# EAGLE board SPY SCH2 (EAGLE 8.7.0)
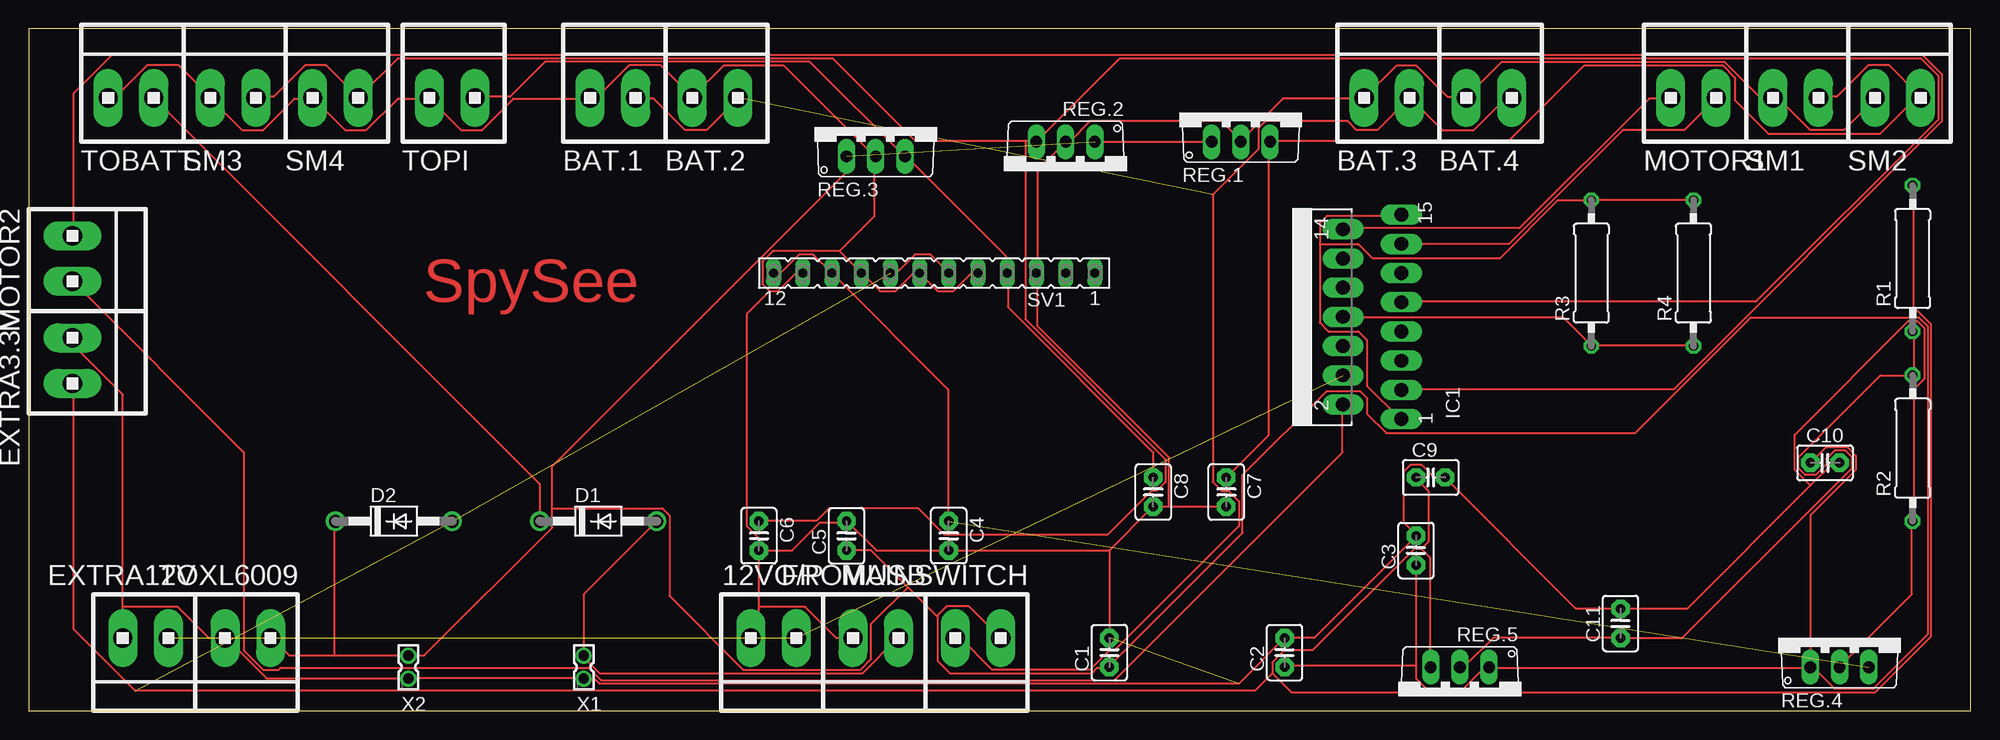
[diagram p0: board, top side]

Size 168.89 x 59.36 mm. Coordinates in mm from the lower left corner, seen from the top.
Outline: 0,0 168.89,0 168.89,59.36 0,59.36 0,0
Copper layers (1*16): Top 0.035mm / dielectric 1.5mm / Bottom 0.035mm
Design rules "default *": minimum track width 10mil, minimum drill 0.35mm, track to track 6mil, track to pad 6mil, pad to pad 6mil, via to via 6mil, smd to smd 6mil, copper to edge 40mil, drill to drill 6mil, minimum pad ring 10mil, minimum via ring 8mil, stop-mask expansion 4mil, vias tented up to drill 0mil, thermal gap 10mil

## Footprints (pad centres in the part's own frame; a part is rotated, then mirrored left to right if it is on the bottom)
1X2MTA = drill 1.676 long: 1 1.981,0; 2 -1.981,0
C2.5-3 = drill 0.813 pad 1.6 octagon: 1 -1.27,0; 2 1.27,0
DO41-10 = drill 1.118: A 5.08,0; C -5.08,0
MULTIWATT-15 = drill 1.2 long: 1 -8.89,-7.62; 2 -7.62,-2.54; 3 -6.35,-7.62; 4 -5.08,-2.54; 5 -3.81,-7.62; 6 -2.54,-2.54; 7 -1.27,-7.62; 8 0,-2.54; 9 1.27,-7.62; 10 2.54,-2.54; 11 3.81,-7.62; 12 5.08,-2.54; 13 6.35,-7.62; 14 7.62,-2.54; 15 8.89,-7.62
0309/12 = drill 0.813 octagon: 1 -6.35,0; 2 6.35,0
TO220V = drill 1.016 long: 1 -2.54,-2.54; 2 0,-2.54; 3 2.54,-2.54
FE12 = drill 0.813 long: 1 -13.97,0; 2 -11.43,0; 3 -8.89,0; 4 -6.35,0; 5 -3.81,0; 6 -1.27,0; 7 1.27,0; 8 3.81,0; 9 6.35,0; 10 8.89,0; 11 11.43,0; 12 13.97,0
332-02 = drill 0.9 pad 1.27: 1 0,-1; 2 0,1

## Placement (x,y rotation side)
12VO/P  [1X2MTA]  64.77,6.35 180 top
BAT.1  [1X2MTA]  50.8,53.34 0 top
BAT.2  [1X2MTA]  59.69,53.34 0 top
BAT.3  [1X2MTA]  118.11,53.34 0 top
BAT.4  [1X2MTA]  127,53.34 0 top
C1  [C2.5-3]  93.98,5.08 90 top
C2  [C2.5-3]  109.22,5.08 90 top
C3  [C2.5-3]  120.65,13.97 90 top
C4  [C2.5-3]  80.01,15.24 270 top
C5  [C2.5-3]  71.12,15.24 90 top
C6  [C2.5-3]  63.5,15.24 270 top
C7  [C2.5-3]  104.14,19.05 270 top
C8  [C2.5-3]  97.79,19.05 270 top
C9  [C2.5-3]  121.92,20.32 0 top
C10  [C2.5-3]  156.21,21.59 0 top
C11  [C2.5-3]  138.43,7.62 90 top
D1  1N4004  [DO41-10]  49.53,16.51 0 top
D2  1N4004  [DO41-10]  31.75,16.51 0 top
EXTRA3.3V  [1X2MTA]  3.81,30.48 270 top
EXTRA12V  [1X2MTA]  10.16,6.35 180 top
FROMUSB  [1X2MTA]  73.66,6.35 180 top
IC1  L298  [MULTIWATT-15]  111.76,34.29 90 top
MAINSWITCH  [1X2MTA]  82.55,6.35 180 top
MOTOR1  [1X2MTA]  144.78,53.34 0 top
MOTOR2  [1X2MTA]  3.81,39.37 270 top
R1  [0309/12]  163.83,39.37 90 top
R2  [0309/12]  163.83,22.86 90 top
R3  [0309/12]  135.89,38.1 90 top
R4  [0309/12]  144.78,38.1 90 top
REG.1  7805TV  [TO220V]  105.41,52.07 0 top
REG.2  7805TV  [TO220V]  90.17,46.99 180 top
REG.3  7805TV  [TO220V]  73.66,50.8 0 top
REG.4  7805TV  [TO220V]  157.48,6.35 0 top
REG.5  AMS117  [TO220V]  124.46,1.27 180 top
SM1  [1X2MTA]  153.67,53.34 0 top
SM2  [1X2MTA]  162.56,53.34 0 top
SM3  [1X2MTA]  17.78,53.34 0 top
SM4  [1X2MTA]  26.67,53.34 0 top
SV1  [FE12]  78.74,38.1 180 top
TOBATT.  [1X2MTA]  8.89,53.34 0 top
TOPI  [1X2MTA]  36.83,53.34 0 top
TOXL6009  [1X2MTA]  19.05,6.35 180 top
X1  CHARGING  [332-02]  48.26,3.81 0 top
X2  ON STATE  [332-02]  33.02,3.81 0 top

## Library data of the parts
12VO/P BAT.1-BAT.4 EXTRA3.3V EXTRA12V FROMUSB MAINSWITCH MOTOR1 MOTOR2 SM1-SM4 TOBATT. TOPI TOXL6009 = con-amp
C1-C11 = capacitor-wima
D1 D2 = diode
IC1 = st-microelectronics; MPN: L298N; OC_FARNELL: 1589425; OC_NEWARK: 32M1527
R1-R4 = resistor
REG.1-REG.5 = linear
SV1 = con-lsta; OC_FARNELL: unknown; OC_NEWARK: unknown
X1 X2 = con-garry

## Nets
N$1: 12VO/P.2 EXTRA12V.2 IC1.4
N$2: 12VO/P.1 BAT.1.2 BAT.2.2 BAT.3.2 BAT.4.2 C1.2 C2.2 C3.2 C4.2 C5.2 C6.2 C7.2 C8.2 C9.2 C10.2 C11.2 EXTRA3.3V.2 EXTRA12V.1 FROMUSB.1 R2.1 REG.1.2 REG.2.2 REG.3.2 REG.4.2 SM1.2 SM2.2 SM3.2 SM4.2 SV1.3 SV1.5 SV1.7 SV1.9 SV1.11 TOBATT..2 TOPI.2 TOXL6009.1 X1.1 X2.1
N$3: D1.C TOBATT..1
N$4: D1.A FROMUSB.2 X1.2
N$8: C8.1 REG.3.3 SV1.4 TOPI.1
N$9: C6.1 IC1.9 REG.2.3 SM3.1 SM4.1
N$15: C1.1 C2.1 C3.1 C5.1 C10.1 D2.C MAINSWITCH.2 REG.1.1 REG.2.1 REG.3.1 REG.4.1 REG.5.1 TOXL6009.2 X2.2
N$16: BAT.1.1 BAT.2.1 BAT.3.1 BAT.4.1 MAINSWITCH.1
N$17: C9.1 D2.A EXTRA3.3V.1 R1.2 REG.5.3 SV1.6 SV1.8
N$19: C4.1 REG.4.3 SV1.10 SV1.12
N$20: C7.1 REG.1.3 SM1.1 SM2.1
N$53: C11.1 R1.1 R2.2 REG.5.2
N$55: IC1.1 IC1.15 R3.2 R4.2
N$57: IC1.2 MOTOR2.1
N$58: IC1.3 MOTOR2.2
N$59: IC1.13 MOTOR1.1
N$60: IC1.14 MOTOR1.2
N$63: IC1.8 R3.1 R4.1

## Tracks (layer width: path | path; a pad name or v marks a point on that pad's centre or on a via)
N$1  (2 unrouted)
N$2  (1 unrouted)
  Top 0.152: SM2.2 160.58,53.29 157.84,50.55 154.94,50.55 152.2,53.29 151.74,53.29 SM1.2 151.59,53.44 150.52,53.44 147.47,56.49 128.12,56.49 125.07,53.44 BAT.4.2 124.92,53.44 123.39,53.44 120.65,56.18 118.97,56.18 BAT.3.2 116.08,53.29 109.07,53.29 105.41,49.63 | 105.41,49.63 103.73,51.31 92.3,51.31 90.63,49.63 90.17,49.63 REG.2.2 90.17,49.48 87.73,47.04 87.73,38.2 SV1.3 87.73,38.05 87.73,33.48 99.16,22.05 99.16,17.78 | 105.41,49.63 REG.1.2 | 93.98,13.97 C1.2 | 93.98,13.97 C8.2 99.16,17.78 | 99.16,17.78 C7.2 | 63.5,9.09 63.5,6.96 62.89,6.35 12VO/P.1 | 63.5,9.09 C6.2 | C6.2 66.4,13.97 68.83,16.41 71.12,16.41 C5.2 71.12,16.56 73.71,13.97 C4.2 93.98,13.97 | FROMUSB.1 70.21,6.35 67.46,9.09 63.5,9.09 | 64.41,36.52 65.18,36.52 66.7,38.05 67.31,38.05 SV1.11 | 64.41,36.52 63.81,37.13 63.81,39.12 64.72,40.03 70.51,40.03 | 70.51,40.03 72.34,38.2 SV1.9 72.49,38.05 74.02,36.52 75.39,36.52 76.91,38.05 77.37,38.05 SV1.7 79.05,36.52 80.42,36.52 81.94,38.05 82.55,38.05 SV1.5 | 73.56,48.26 73.56,43.08 70.51,40.03 | 57.71,53.44 54.97,56.18 52.22,56.18 49.48,53.44 48.87,53.44 BAT.1.2 48.72,53.29 42.16,53.29 39.42,50.55 37.59,50.55 34.85,53.29 | TOBATT..2 6.96,53.44 7.57,53.44 10.31,56.18 13.06,56.18 15.8,53.44 SM3.2 15.8,53.29 18.54,50.55 20.37,50.55 23.11,53.29 24.64,53.29 SM4.2 24.79,53.29 27.53,50.55 29.36,50.55 32.11,53.29 34.85,53.29 | 34.85,53.29 TOPI.2 | 73.56,48.26 65.63,56.18 60.45,56.18 57.71,53.44 | 73.56,48.26 REG.3.2 | 57.71,53.44 BAT.2.2 | C6.2 63.5,15.04 62.43,16.1 62.43,34.54 64.41,36.52 | 33.02,2.85 48.26,2.85 X1.1 48.26,2.69 49.33,2.69 49.63,2.39 105.26,2.39 C2.2 111.81,6.35 120.65,15.19 C3.2 120.65,15.34 119.58,16.41 119.58,20.83 120.19,21.44 121.11,21.44 122.17,20.37 123.09,20.37 C9.2 123.24,20.22 134.52,8.94 138.33,8.94 C11.2 138.48,8.94 144.27,8.94 154.94,19.61
  Top 0.152: EXTRA12V.1 8.18,9.09 | 8.18,9.09 8.18,27.53 3.91,31.8 3.91,32.41 EXTRA3.3V.2 | 8.18,9.09 12.9,9.09 15.65,6.35 TOXL6009.1 17.17,6.35 20.68,2.85 33.02,2.85 | 33.02,2.85 X2.1 | REG.4.2 157.53,3.91 163.78,10.16 163.78,16.41 R2.1 163.93,16.56 163.93,27.99 164.85,28.91 164.85,33.32 164.24,33.93 163.47,33.93 153.57,24.03 153.57,20.98 154.94,19.61 | C10.2 156.92,21.59 154.94,19.61
N$3
  Top 0.152: D1.C 44.45,19.76 TOBATT..1
N$4
  Top 0.152: D1.A 48.26,10.16 X1.2 48.26,4.67 49.63,3.3 72.49,3.3 75.54,6.35 FROMUSB.2
N$8
  Top 0.152: C8.1 97.79,22.5 85.14,35.15 85.14,38.05 SV1.4 84.99,38.2 84.99,39.57 76.3,48.26 REG.3.3 76.15,48.26 67.92,56.49 44.91,56.49 41.86,53.44 38.81,53.44 TOPI.1
N$9
  Top 0.152: 86.66,49.63 77.06,49.63 69.9,56.79 32.11,56.79 SM4.1 28.6,53.44 25.86,56.18 24.03,56.18 21.29,53.44 19.76,53.44 SM3.1 | 86.66,49.63 87.58,49.63 REG.2.3 94.89,56.79 164.54,56.79 166.06,55.27 166.06,51.46 150.22,35.61 119.43,35.61 IC1.9 | 86.66,49.63 86.66,34.09 98.86,21.89 98.86,19.91 98.09,19.15 97.64,19.15 93.83,15.34 79.65,15.34 77.37,17.63 69.6,17.63 68.53,16.56 63.5,16.56 C6.1
N$15  (1 unrouted)
  Top 0.152: C10.1 156.31,22.96 158.14,22.96 158.9,22.2 158.9,20.98 154.94,17.02 REG.4.1 154.94,3.76 | C3.1 120.65,3.91 | 120.65,3.91 120.65,2.85 121.56,1.93 124.77,1.93 126.59,3.76 126.9,3.76 REG.5.1 127.05,3.76 154.94,3.76 | 120.65,3.91 109.22,3.91 C2.1 | 79.05,8.18 79.05,8.33 79.81,9.09 81.79,9.09 MAINSWITCH.2 | 79.05,8.18 79.05,4.37 80.11,3.3 92.46,3.3 92.91,3.76 93.98,3.76 C1.1 93.98,3.91 105.56,15.49 105.56,20.52 112.88,27.84 115.77,27.84 116.38,27.23 116.38,25.86 118.06,24.18 139.7,24.18 149.76,34.24 164.39,34.24 165.15,33.48 165.15,6.65 160.43,1.93 157.07,1.93 155.25,3.76 154.94,3.76 | C5.1 73.25,13.97 76.45,10.77 | 79.05,8.18 76.45,10.77 | 26.62,4.83 22.66,4.83 21.13,6.35 TOXL6009.2 | 26.62,4.83 33.02,4.83 | REG.3.1 71.12,46.89 45.52,21.29 45.52,17.63 | 45.52,17.63 45.52,15.95 34.39,4.83 33.02,4.83 | 33.02,4.83 X2.2 | 26.62,4.83 26.62,16.41 D2.C | 76.45,10.77 73.25,7.57 73.25,4.52 72.34,3.61 62.13,3.61 55.73,10.01 55.73,17.02 55.12,17.63 45.52,17.63 | REG.2.1 92.76,49.48 102.82,49.48 REG.1.1
N$16  (1 unrouted)
  Top 0.152: BAT.1.1 52.83,53.29 54.36,53.29 57.1,50.55 58.93,50.55 61.67,53.29 BAT.2.1 | MAINSWITCH.1 81.03,6.35 83.77,3.61 92.3,3.61 93.98,5.28 94.44,5.28 105.26,16.1 105.26,18.24 104.34,19.15 103.73,19.15 102.97,19.91 102.97,44.91 106.93,48.87 106.93,50.7 107.54,51.31 114.71,51.31 115.47,50.55 117.3,50.55 BAT.3.1 120.19,53.29 122.94,50.55 125.68,50.55 128.42,53.29 128.88,53.29 BAT.4.1
N$17  (2 unrouted)
  Top 0.152: SV1.8 74.93,38.2 75.54,38.2 77.06,39.73 78.44,39.73 79.96,38.2 SV1.6 | 108.15,3.3 109.83,1.63 160.58,1.63 165.46,6.5 165.46,33.63 163.93,35.15 163.93,45.67 R1.2 | 108.15,3.3 108.15,4.22 109.22,5.28 111.66,5.28 120.5,14.12 121.11,14.12 | 121.11,14.12 121.72,14.73 121.72,19.15 120.65,20.22 C9.1 | 121.11,14.12 121.87,13.36 121.87,3.91 REG.5.3 | 108.15,3.3 106.63,1.78 9.25,1.78 3.91,7.11 3.91,28.45 EXTRA3.3V.1
N$19  (1 unrouted)
  Top 0.152: SV1.12 64.87,38.2 65.48,38.2 67,39.73 68.22,39.73 SV1.10 79.96,27.99 79.96,16.56 C4.1
N$20
  Top 0.152: 164.39,53.59 164.54,53.44 SM2.1 164.39,53.59 | 164.39,53.59 161.8,56.18 159.97,56.18 157.23,53.44 155.7,53.44 SM1.1 | C7.1 107.85,24.03 107.85,49.48 REG.1.3 108,49.63 128.73,49.63 135.28,56.18 147.32,56.18 148.39,55.12 148.39,53.14 151.28,50.24 161.04,50.24 164.39,53.59
N$53
  Top 0.152: R1.1 163.93,33.02 163.93,29.21 R2.2 161.04,29.21 153.87,22.05 153.87,21.13 154.48,20.52 155.4,20.52 156.31,21.44 156.31,21.89 157.07,22.66 157.99,22.66 158.6,22.05 158.6,21.13 143.81,6.35 C11.1 127.36,6.35 124.92,3.91 124.46,3.91 REG.5.2
N$55
  Top 0.152: R4.2 R3.2 132.99,44.45 127.97,39.42 116.84,39.42 115.62,40.64 112.27,40.64 | 112.27,40.64 112.27,42.47 112.88,43.08 119.28,43.08 IC1.15 | 112.27,40.64 112.27,33.78 113.03,33.02 115.62,33.02 116.38,32.26 116.38,28.3 119.28,25.4 IC1.1
N$57
  Top 0.152: MOTOR2.1 18.69,22.5 18.69,5.28 20.37,3.61 21.74,3.61 21.89,3.76 48.72,3.76 49.78,2.69 94.44,2.69 114.25,22.5 114.25,26.62 IC1.2
N$58
  Top 0.152: IC1.3 119.43,27.99 143.05,27.99 166.37,51.31 166.37,55.42 164.69,57.1 7.26,57.1 3.91,53.75 3.91,41.4 MOTOR2.2
N$59
  Top 0.152: IC1.13 128.73,40.64 138.63,50.55 143.97,50.55 MOTOR1.1
N$60
  Top 0.152: IC1.14 114.4,42.01 129.64,42.01 140.92,53.29 142.75,53.29 MOTOR1.2
N$63
  Top 0.152: 135.89,31.8 144.73,31.8 R4.1 | 135.89,31.8 133.45,34.24 114.4,34.24 IC1.8 | 135.89,31.8 R3.1

## Text on the board
Top: SpySee